# EAGLE board Arduino-Pro-Panel-v16 (EAGLE 7.5.0), part 1 of 2
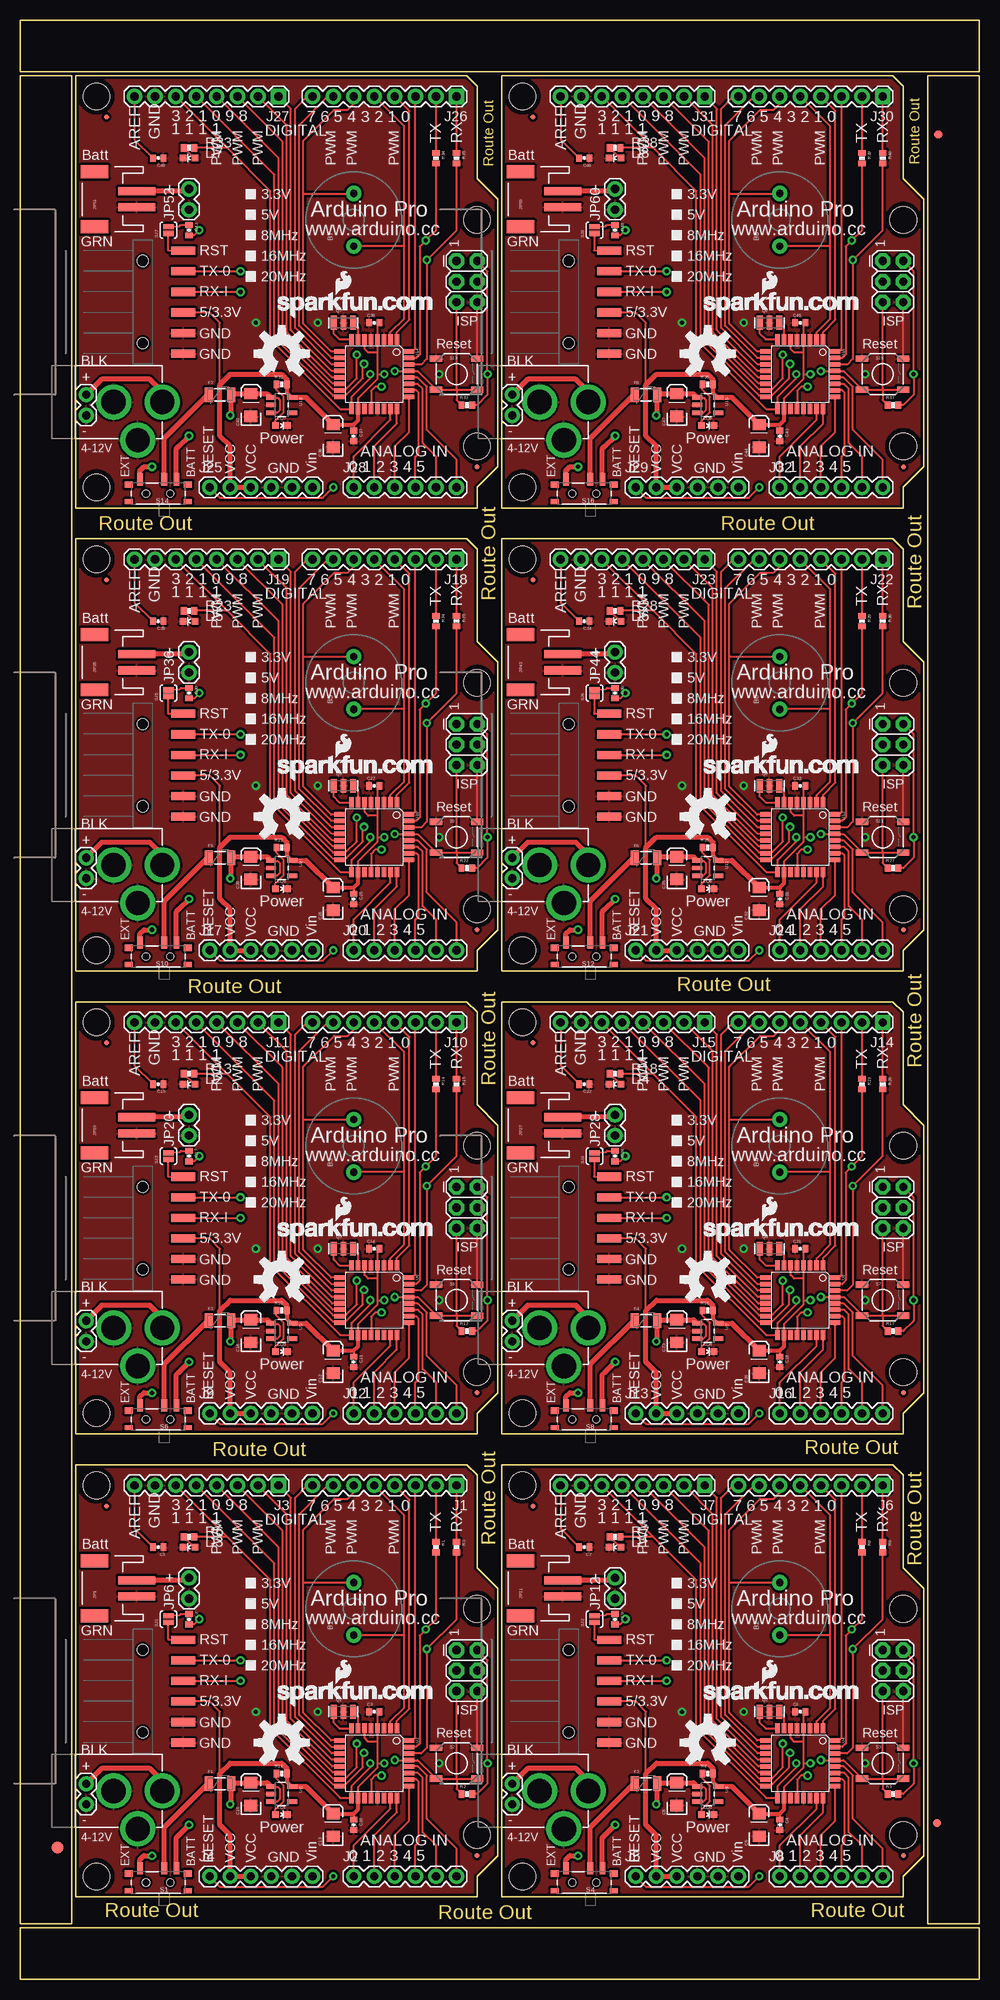
[diagram p0: board, top side]
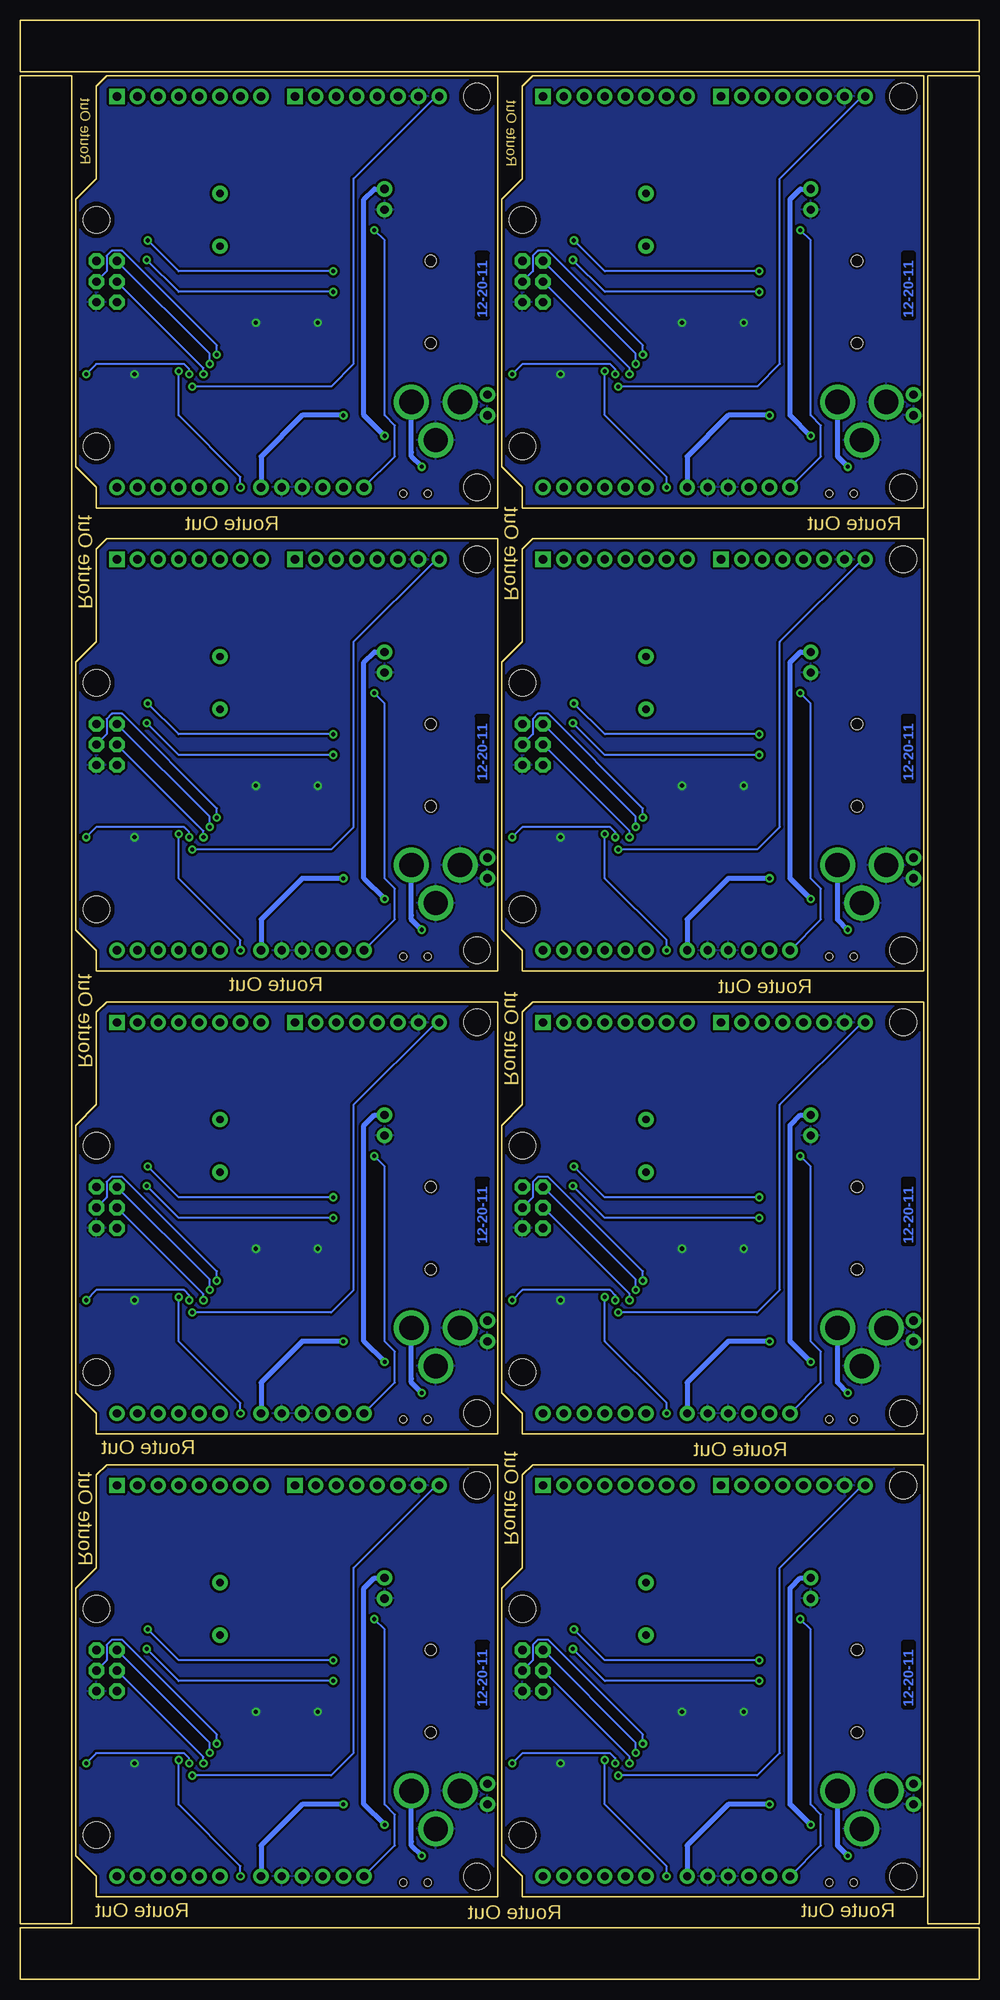
[diagram p1: board, bottom side, seen from below]

Size 118.36 x 241.81 mm. Coordinates in mm from the lower left corner, seen from the top.
Outline: 79.25,0 0,0 0,6.35 29.72,6.35
Outline: 27.18,6.35 118.36,6.35 118.36,0 76.71,0
Outline: 6.35,82.55 6.35,6.86 0,6.86 0,33.02
Outline: 0,30.48 0,234.95 6.35,234.95 6.35,80.01
Outline: 118.36,82.55 118.36,6.86 112.01,6.86 112.01,33.02
Outline: 112.01,30.48 112.01,234.95 118.36,234.95 118.36,80.01
Outline: 39.12,241.81 118.36,241.81 118.36,235.46 88.65,235.46
Outline: 91.19,235.46 0,235.46 0,241.81 41.66,241.81
Outline: 6.86,63.5 6.86,10.16 56.39,10.16 56.39,12.7 58.93,15.24 58.93,48.26 56.39,50.8 56.39,62.23 55.12,63.5 6.86,63.5
Outline: 59.44,63.5 59.44,10.16 108.97,10.16 108.97,12.7 111.51,15.24 111.51,48.26 108.97,50.8 108.97,62.23 107.7,63.5 59.44,63.5
Outline: 6.86,120.65 6.86,67.31 56.39,67.31 56.39,69.85 58.93,72.39 58.93,105.41 56.39,107.95 56.39,119.38 55.12,120.65 6.86,120.65
Outline: 59.44,120.65 59.44,67.31 108.97,67.31 108.97,69.85 111.51,72.39 111.51,105.41 108.97,107.95 108.97,119.38 107.7,120.65 59.44,120.65
Outline: 6.86,177.8 6.86,124.46 56.39,124.46 56.39,127 58.93,129.54 58.93,162.56 56.39,165.1 56.39,176.53 55.12,177.8 6.86,177.8
Outline: 59.44,177.8 59.44,124.46 108.97,124.46 108.97,127 111.51,129.54 111.51,162.56 108.97,165.1 108.97,176.53 107.7,177.8 59.44,177.8
Outline: 6.86,234.95 6.86,181.61 56.39,181.61 56.39,184.15 58.93,186.69 58.93,219.71 56.39,222.25 56.39,233.68 55.12,234.95 6.86,234.95
Outline: 59.44,234.95 59.44,181.61 108.97,181.61 108.97,184.15 111.51,186.69 111.51,219.71 108.97,222.25 108.97,233.68 107.7,234.95 59.44,234.95
Copper layers (1*16): Top 0.035mm / dielectric 1.5mm / Bottom 0.035mm
Design rules "SparkFun": minimum track width 8mil, minimum drill 20mil, track to track 8mil, track to pad 8mil, pad to pad 8mil, via to via 8mil, smd to smd 8mil, copper to edge 10mil, drill to drill 8mil, minimum pad ring 12mil, minimum via ring 10mil, stop-mask expansion 4mil, vias tented up to drill 20mil, thermal gap 10mil
Net classes: 0 default: width 0.203 mm; 1 vcc: width 0.254 mm

## Footprints (pad centres in the part's own frame; a part is rotated, then mirrored left to right if it is on the bottom)
BUZZER-12MM-NS-KIT = drill 0.9 pad 1.88: + 3.25,0; - -3.25,0
0402-CAP = smd 0.7 x 0.9: 1 -0.65,0; 2 0.65,0
EIA3216 = smd 1.4 x 1.6: A 1.4,0; C -1.4,0
LED-0603 = smd 0.8 x 0.8: A 0,-0.75; C 0,0.75
FIDUCIAL-1.5X3 = smd 1.5 x 1.5: 1 0,0
FIDUCIAL-1X2 = smd 1 x 1: 1 0,0
PTC-1206 = smd 1 x 1.8: 1 -1.4,0; 2 1.4,0
1X08 = drill 1.016 pad 1.88 square: 1 0,0 | drill 1.016 pad 1.88: 2 2.54,0; 3 5.08,0; 4 7.62,0; 5 10.16,0; 6 12.7,0; 7 15.24,0; 8 17.78,0
1X06 = drill 1.016 pad 1.88: 1 0,0; 2 2.54,0; 3 5.08,0; 4 7.62,0; 5 10.16,0; 6 12.7,0
JST-2-SMD = smd 1 x 4.6: 1 -1,-3.7; 2 1,-3.7 | smd 1.6 x 3.4: NC1 -3.4,1.5; NC2 3.4,1.5
FIDUCIAL-1X2.5 = smd 0.635 x 0.635: 1 0,0
2X3 = drill 1.016 pad 1.88 octagon: 1 0,0; 2 0,2.54; 3 2.54,0; 4 2.54,2.54; 5 5.08,0; 6 5.08,2.54
POWER_JACK_PTH = drill 2.997 pad 4.318: GND 0,7.7; GNDBREAK 4.7,10.7; PWR 0,13.7
1X02 = drill 1.016 pad 1.88: 1 0,0; 2 2.54,0
1X06-SMD = smd 1 x 3: 1 -6.35,5; 2 -3.81,5; 3 -1.27,5; 4 1.27,5; 5 3.81,5; 6 6.35,5 | hole 1.4: -5.08,0; 5.08,0
RESONATOR-SMD = smd 0.7 x 1.7: 1 -1.2,0; 2 0,0; 3 1.2,0
0402-RES = smd 0.7 x 0.9: 1 -0.65,0; 2 0.65,0
SWITCH-SPST-SMD-A = smd 0.7 x 1.5: 1 -2.25,-1.75; 2 -0.75,-1.75; 3 2.25,-1.75 | smd 1 x 0.6: GND1 -3.65,1; GND3 3.65,1 | smd 1 x 0.8: GND2 -3.65,-1.1; GND4 3.65,-1.1 | hole 0.9: -1.5,0; 1.5,0
TACTILE_SWITCH_SMD = smd 1.524 x 0.762: 1 -2.54,1.905; 2 2.54,1.905; 3 -2.54,-1.905; 4 2.54,-1.905
SJ_2S-NOTRACE = smd 0.635 x 1.27: 1 -0.401,0; 2 0.413,0
TQFP32-08 = smd 1.27 x 0.559: 1 -4.293,2.8; 2 -4.293,2; 3 -4.293,1.2; 4 -4.293,0.4; 5 -4.293,-0.4; 6 -4.293,-1.2; 7 -4.293,-2; 8 -4.293,-2.8; 17 4.293,-2.8; 18 4.293,-2; 19 4.293,-1.2; 20 4.293,-0.4; 21 4.293,0.4; 22 4.293,1.2; 23 4.293,2; 24 4.293,2.8 | smd 0.559 x 1.27: 9 -2.8,-4.293; 10 -2,-4.293; 11 -1.2,-4.293; 12 -0.4,-4.293; 13 0.4,-4.293; 14 1.2,-4.293; 15 2,-4.293; 16 2.8,-4.293; 25 2.8,4.293; 26 2,4.293; 27 1.2,4.293; 28 0.4,4.293; 29 -0.4,4.293; 30 -1.2,4.293; 31 -2,4.293; 32 -2.8,4.293
SOT23-5 = smd 0.55 x 1.2: 1 -0.95,-1.3; 2 0,-1.3; 3 0.95,-1.3; 4 0.95,1.3; 5 -0.95,1.3
STAND-OFF = hole 3.302: 0,0

## Placement (x,y rotation side)
B1  BUZZER  [BUZZER-12MM-NS-KIT]  41.15,45.72 90 top
B2  BUZZER  [BUZZER-12MM-NS-KIT]  93.73,45.72 90 top
B3  BUZZER  [BUZZER-12MM-NS-KIT]  41.15,102.87 90 top
B4  BUZZER  [BUZZER-12MM-NS-KIT]  93.73,102.87 90 top
B5  BUZZER  [BUZZER-12MM-NS-KIT]  41.15,160.02 90 top
B6  BUZZER  [BUZZER-12MM-NS-KIT]  93.73,160.02 90 top
B7  BUZZER  [BUZZER-12MM-NS-KIT]  41.15,217.17 90 top
B8  BUZZER  [BUZZER-12MM-NS-KIT]  93.73,217.17 90 top
C1  0.1uF  [0402-CAP]  17.02,53.34 180 top
C2  0.1uF  [0402-CAP]  20.83,44.45 270 top
C3  0.1uF  [0402-CAP]  43.69,33.02 0 top
C4  0.1uF  [0402-CAP]  93.73,19.05 270 top
C5  10uF  [EIA3216]  91.19,19.05 90 top
C6  0.1uF  [0402-CAP]  96.27,33.02 0 top
C7  0.1uF  [0402-CAP]  69.6,53.34 180 top
C8  10uF  [EIA3216]  81.03,22.86 90 top
C9  0.1uF  [0402-CAP]  73.41,44.45 270 top
C10  0.1uF  [0402-CAP]  41.15,19.05 270 top
C11  0.1uF  [0402-CAP]  41.15,76.2 270 top
C12  10uF  [EIA3216]  38.61,76.2 90 top
C13  10uF  [EIA3216]  38.61,19.05 90 top
C14  0.1uF  [0402-CAP]  43.69,90.17 0 top
C15  0.1uF  [0402-CAP]  17.02,110.49 180 top
C16  10uF  [EIA3216]  28.45,80.01 90 top
C17  0.1uF  [0402-CAP]  20.83,101.6 270 top
C18  0.1uF  [0402-CAP]  93.73,76.2 270 top
C19  10uF  [EIA3216]  28.45,22.86 90 top
C20  10uF  [EIA3216]  91.19,76.2 90 top
C21  0.1uF  [0402-CAP]  96.27,90.17 0 top
C22  0.1uF  [0402-CAP]  69.6,110.49 180 top
C23  10uF  [EIA3216]  81.03,80.01 90 top
C24  0.1uF  [0402-CAP]  73.41,101.6 270 top
C25  0.1uF  [0402-CAP]  41.15,133.35 270 top
C26  10uF  [EIA3216]  38.61,133.35 90 top
C27  0.1uF  [0402-CAP]  43.69,147.32 0 top
C28  0.1uF  [0402-CAP]  17.02,167.64 180 top
C29  10uF  [EIA3216]  28.45,137.16 90 top
C30  0.1uF  [0402-CAP]  20.83,158.75 270 top
C31  0.1uF  [0402-CAP]  93.73,133.35 270 top
C32  10uF  [EIA3216]  91.19,133.35 90 top
C33  0.1uF  [0402-CAP]  96.27,147.32 0 top
C34  0.1uF  [0402-CAP]  69.6,167.64 180 top
C35  10uF  [EIA3216]  81.03,137.16 90 top
C36  0.1uF  [0402-CAP]  73.41,158.75 270 top
C37  0.1uF  [0402-CAP]  41.15,190.5 270 top
C38  10uF  [EIA3216]  38.61,190.5 90 top
C39  0.1uF  [0402-CAP]  43.69,204.47 0 top
C40  0.1uF  [0402-CAP]  17.02,224.79 180 top
C41  10uF  [EIA3216]  28.45,194.31 90 top
C42  0.1uF  [0402-CAP]  20.83,215.9 270 top
C43  0.1uF  [0402-CAP]  93.73,190.5 270 top
C44  10uF  [EIA3216]  91.19,190.5 90 top
C45  0.1uF  [0402-CAP]  96.27,204.47 0 top
C46  0.1uF  [0402-CAP]  69.6,224.79 180 top
C47  10uF  [EIA3216]  81.03,194.31 90 top
C48  0.1uF  [0402-CAP]  73.41,215.9 270 top
D1  Green  [LED-0603]  73.41,53.34 90 top
D2  Green  [LED-0603]  20.83,110.49 90 top
D3  Green  [LED-0603]  20.83,53.34 90 top
D4  Green  [LED-0603]  73.41,110.49 90 top
D5  Green  [LED-0603]  20.83,167.64 90 top
D6  Green  [LED-0603]  73.41,167.64 90 top
D7  Green  [LED-0603]  20.83,224.79 90 top
D8  Green  [LED-0603]  73.41,224.79 90 top
E$1  [FIDUCIAL-1.5X3]  4.57,16.26 0 top
E$5  [FIDUCIAL-1X2]  113.16,19.3 0 top
E$7  [FIDUCIAL-1X2]  113.28,227.71 90 top
F1  500mA-PTC  [PTC-1206]  24.64,24.13 0 top
F2  500mA-PTC  [PTC-1206]  77.22,24.13 0 top
F3  500mA-PTC  [PTC-1206]  24.64,81.28 0 top
F4  500mA-PTC  [PTC-1206]  77.22,81.28 0 top
F5  500mA-PTC  [PTC-1206]  24.64,138.43 0 top
F6  500mA-PTC  [PTC-1206]  77.22,138.43 0 top
F7  500mA-PTC  [PTC-1206]  24.64,195.58 0 top
F8  500mA-PTC  [PTC-1206]  77.22,195.58 0 top
J1  Digital  [1X08]  53.85,60.96 180 top
J2  Analog  [1X06]  41.15,12.7 0 top
J3  [1X08]  31.88,60.96 180 top
J4  POWER  [1X06]  23.37,12.7 0 top
J5  POWER  [1X06]  75.95,12.7 0 top
J6  Digital  [1X08]  106.43,60.96 180 top
J7  [1X08]  84.45,60.96 180 top
J8  Analog  [1X06]  93.73,12.7 0 top
J9  POWER  [1X06]  23.37,69.85 0 top
J10  Digital  [1X08]  53.85,118.11 180 top
J11  [1X08]  31.88,118.11 180 top
J12  Analog  [1X06]  41.15,69.85 0 top
J13  POWER  [1X06]  75.95,69.85 0 top
J14  Digital  [1X08]  106.43,118.11 180 top
J15  [1X08]  84.45,118.11 180 top
J16  Analog  [1X06]  93.73,69.85 0 top
J17  POWER  [1X06]  23.37,127 0 top
J18  Digital  [1X08]  53.85,175.26 180 top
J19  [1X08]  31.88,175.26 180 top
J20  Analog  [1X06]  41.15,127 0 top
J21  POWER  [1X06]  75.95,127 0 top
J22  Digital  [1X08]  106.43,175.26 180 top
J23  [1X08]  84.45,175.26 180 top
J24  Analog  [1X06]  93.73,127 0 top
J25  POWER  [1X06]  23.37,184.15 0 top
J26  Digital  [1X08]  53.85,232.41 180 top
J27  [1X08]  31.88,232.41 180 top
J28  Analog  [1X06]  41.15,184.15 0 top
J29  POWER  [1X06]  75.95,184.15 0 top
J30  Digital  [1X08]  106.43,232.41 180 top
J31  [1X08]  84.45,232.41 180 top
J32  Analog  [1X06]  93.73,184.15 0 top
JP1  LiPo  [JST-2-SMD]  10.67,48.26 90 top
JP2  FIDUCIAL1X2.5  [FIDUCIAL-1X2.5]  56.39,15.24 0 top
JP3  ISP  [2X3]  53.85,40.64 270 top
JP4  POWER_JACKPTH  [POWER_JACK_PTH]  3.81,23.24 270 top
JP5  FIDUCIAL1X2.5  [FIDUCIAL-1X2.5]  10.67,58.42 0 top
JP6  External  [1X02]  20.83,46.99 90 top
JP7  External  [1X02]  8.13,21.59 90 top
JP8  POWER_JACKPTH  [POWER_JACK_PTH]  56.39,23.24 270 top
JP9  Program  [1X06-SMD]  15.11,35.56 270 top
JP10  ISP  [2X3]  106.43,40.64 270 top
JP11  LiPo  [JST-2-SMD]  63.25,48.26 90 top
JP12  External  [1X02]  73.41,46.99 90 top
JP13  External  [1X02]  60.71,21.59 90 top
JP14  Program  [1X06-SMD]  67.69,35.56 270 top
JP15  FIDUCIAL1X2.5  [FIDUCIAL-1X2.5]  108.97,15.24 0 top
JP16  FIDUCIAL1X2.5  [FIDUCIAL-1X2.5]  63.25,58.42 0 top
JP17  POWER_JACKPTH  [POWER_JACK_PTH]  3.81,80.39 270 top
JP18  ISP  [2X3]  53.85,97.79 270 top
JP19  LiPo  [JST-2-SMD]  10.67,105.41 90 top
JP20  External  [1X02]  20.83,104.14 90 top
JP21  External  [1X02]  8.13,78.74 90 top
JP22  Program  [1X06-SMD]  15.11,92.71 270 top
JP23  FIDUCIAL1X2.5  [FIDUCIAL-1X2.5]  56.39,72.39 0 top
JP24  FIDUCIAL1X2.5  [FIDUCIAL-1X2.5]  10.67,115.57 0 top
JP25  POWER_JACKPTH  [POWER_JACK_PTH]  56.39,80.39 270 top
JP26  ISP  [2X3]  106.43,97.79 270 top
JP27  LiPo  [JST-2-SMD]  63.25,105.41 90 top
JP28  External  [1X02]  73.41,104.14 90 top
JP29  External  [1X02]  60.71,78.74 90 top
JP30  Program  [1X06-SMD]  67.69,92.71 270 top
JP31  FIDUCIAL1X2.5  [FIDUCIAL-1X2.5]  108.97,72.39 0 top
JP32  FIDUCIAL1X2.5  [FIDUCIAL-1X2.5]  63.25,115.57 0 top
JP33  POWER_JACKPTH  [POWER_JACK_PTH]  3.81,137.54 270 top
JP34  ISP  [2X3]  53.85,154.94 270 top
JP35  LiPo  [JST-2-SMD]  10.67,162.56 90 top
JP36  External  [1X02]  20.83,161.29 90 top
JP37  External  [1X02]  8.13,135.89 90 top
JP38  Program  [1X06-SMD]  15.11,149.86 270 top
JP39  FIDUCIAL1X2.5  [FIDUCIAL-1X2.5]  56.39,129.54 0 top
JP40  FIDUCIAL1X2.5  [FIDUCIAL-1X2.5]  10.67,172.72 0 top
JP41  POWER_JACKPTH  [POWER_JACK_PTH]  56.39,137.54 270 top
JP42  ISP  [2X3]  106.43,154.94 270 top
JP43  LiPo  [JST-2-SMD]  63.25,162.56 90 top
JP44  External  [1X02]  73.41,161.29 90 top
JP45  External  [1X02]  60.71,135.89 90 top
JP46  Program  [1X06-SMD]  67.69,149.86 270 top
JP47  FIDUCIAL1X2.5  [FIDUCIAL-1X2.5]  108.97,129.54 0 top
JP48  FIDUCIAL1X2.5  [FIDUCIAL-1X2.5]  63.25,172.72 0 top
JP49  POWER_JACKPTH  [POWER_JACK_PTH]  3.81,194.69 270 top
JP50  ISP  [2X3]  53.85,212.09 270 top
JP51  LiPo  [JST-2-SMD]  10.67,219.71 90 top
JP52  External  [1X02]  20.83,218.44 90 top
JP53  External  [1X02]  8.13,193.04 90 top
JP54  Program  [1X06-SMD]  15.11,207.01 270 top
JP55  FIDUCIAL1X2.5  [FIDUCIAL-1X2.5]  56.39,186.69 0 top
JP56  FIDUCIAL1X2.5  [FIDUCIAL-1X2.5]  10.67,229.87 0 top
JP57  POWER_JACKPTH  [POWER_JACK_PTH]  56.39,194.69 270 top
JP58  ISP  [2X3]  106.43,212.09 270 top
JP59  LiPo  [JST-2-SMD]  63.25,219.71 90 top
JP60  External  [1X02]  73.41,218.44 90 top
JP61  External  [1X02]  60.71,193.04 90 top
JP62  Program  [1X06-SMD]  67.69,207.01 270 top
JP63  FIDUCIAL1X2.5  [FIDUCIAL-1X2.5]  108.97,186.69 0 top
JP64  FIDUCIAL1X2.5  [FIDUCIAL-1X2.5]  63.25,229.87 0 top
LED1  Red  [LED-0603]  32.26,20.32 270 top
LED2  Red  [LED-0603]  84.84,20.32 270 top
LED3  Red  [LED-0603]  32.26,77.47 270 top
LED4  Red  [LED-0603]  84.84,77.47 270 top
LED5  Red  [LED-0603]  32.26,134.62 270 top
LED6  Red  [LED-0603]  84.84,134.62 270 top
LED7  Red  [LED-0603]  32.26,191.77 270 top
LED8  Red  [LED-0603]  84.84,191.77 270 top
Q1  RESONATORSMD  [RESONATOR-SMD]  39.88,33.02 0 top
Q2  RESONATORSMD  [RESONATOR-SMD]  92.46,33.02 0 top
Q3  RESONATORSMD  [RESONATOR-SMD]  39.88,90.17 0 top
Q4  RESONATORSMD  [RESONATOR-SMD]  92.46,90.17 0 top
Q5  RESONATORSMD  [RESONATOR-SMD]  39.88,147.32 0 top
Q6  RESONATORSMD  [RESONATOR-SMD]  92.46,147.32 0 top
Q7  RESONATORSMD  [RESONATOR-SMD]  39.88,204.47 0 top
Q8  RESONATORSMD  [RESONATOR-SMD]  92.46,204.47 0 top
R1  1K  [0402-RES]  51.31,53.34 270 top
R2  10K  [0402-RES]  55.12,22.86 0 top
R3  1K  [0402-RES]  53.85,53.34 270 top
R4  4.7K  [0402-RES]  84.84,25.4 0 top
R5  10K  [0402-RES]  107.7,22.86 0 top
R6  1K  [0402-RES]  20.83,54.61 180 top
R7  1K  [0402-RES]  73.41,54.61 180 top
R8  1K  [0402-RES]  103.89,53.34 270 top
R9  1K  [0402-RES]  106.43,53.34 270 top
R10  4.7K  [0402-RES]  32.26,82.55 0 top
R11  4.7K  [0402-RES]  32.26,25.4 0 top
R12  10K  [0402-RES]  55.12,80.01 0 top
R13  1K  [0402-RES]  20.83,111.76 180 top
R14  1K  [0402-RES]  51.31,110.49 270 top
R15  1K  [0402-RES]  53.85,110.49 270 top
R16  4.7K  [0402-RES]  84.84,82.55 0 top
R17  10K  [0402-RES]  107.7,80.01 0 top
R18  1K  [0402-RES]  73.41,111.76 180 top
R19  1K  [0402-RES]  103.89,110.49 270 top
R20  1K  [0402-RES]  106.43,110.49 270 top
R21  4.7K  [0402-RES]  32.26,139.7 0 top
R22  10K  [0402-RES]  55.12,137.16 0 top
R23  1K  [0402-RES]  20.83,168.91 180 top
R24  1K  [0402-RES]  51.31,167.64 270 top
R25  1K  [0402-RES]  53.85,167.64 270 top
R26  4.7K  [0402-RES]  84.84,139.7 0 top
R27  10K  [0402-RES]  107.7,137.16 0 top
R28  1K  [0402-RES]  73.41,168.91 180 top
R29  1K  [0402-RES]  103.89,167.64 270 top
R30  1K  [0402-RES]  106.43,167.64 270 top
R31  4.7K  [0402-RES]  32.26,196.85 0 top
R32  10K  [0402-RES]  55.12,194.31 0 top
R33  1K  [0402-RES]  20.83,226.06 180 top
R34  1K  [0402-RES]  51.31,224.79 270 top
R35  1K  [0402-RES]  53.85,224.79 270 top
R36  4.7K  [0402-RES]  84.84,196.85 0 top
R37  10K  [0402-RES]  107.7,194.31 0 top
R38  1K  [0402-RES]  73.41,226.06 180 top
R39  1K  [0402-RES]  103.89,224.79 270 top
R40  1K  [0402-RES]  106.43,224.79 270 top
S1  Select  [SWITCH-SPST-SMD-A]  17.02,11.94 180 top
S2  Reset  [TACTILE_SWITCH_SMD]  53.85,26.67 0 top
S3  Reset  [TACTILE_SWITCH_SMD]  106.43,26.67 0 top
S4  Select  [SWITCH-SPST-SMD-A]  69.6,11.94 180 top
S5  Reset  [TACTILE_SWITCH_SMD]  53.85,83.82 0 top
S6  Select  [SWITCH-SPST-SMD-A]  17.02,69.09 180 top
S7  Reset  [TACTILE_SWITCH_SMD]  106.43,83.82 0 top
S8  Select  [SWITCH-SPST-SMD-A]  69.6,69.09 180 top
S9  Reset  [TACTILE_SWITCH_SMD]  53.85,140.97 0 top
S10  Select  [SWITCH-SPST-SMD-A]  17.02,126.24 180 top
S11  Reset  [TACTILE_SWITCH_SMD]  106.43,140.97 0 top
S12  Select  [SWITCH-SPST-SMD-A]  69.6,126.24 180 top
S13  Reset  [TACTILE_SWITCH_SMD]  53.85,198.12 0 top
S14  Select  [SWITCH-SPST-SMD-A]  17.02,183.39 180 top
S15  Reset  [TACTILE_SWITCH_SMD]  106.43,198.12 0 top
S16  Select  [SWITCH-SPST-SMD-A]  69.6,183.39 180 top
SJ1  SOLDERJUMPERNC3  [SJ_2S-NOTRACE]  18.29,44.45 90 top
SJ2  SOLDERJUMPERNC3  [SJ_2S-NOTRACE]  70.87,44.45 90 top
SJ3  SOLDERJUMPERNC3  [SJ_2S-NOTRACE]  18.29,101.6 90 top
SJ4  SOLDERJUMPERNC3  [SJ_2S-NOTRACE]  70.87,101.6 90 top
SJ5  SOLDERJUMPERNC3  [SJ_2S-NOTRACE]  18.29,158.75 90 top
SJ6  SOLDERJUMPERNC3  [SJ_2S-NOTRACE]  70.87,158.75 90 top
SJ7  SOLDERJUMPERNC3  [SJ_2S-NOTRACE]  18.29,215.9 90 top
SJ8  SOLDERJUMPERNC3  [SJ_2S-NOTRACE]  70.87,215.9 90 top
U1  ATMEGA328  [TQFP32-08]  43.69,26.67 270 top
U2  3.3V  [SOT23-5]  32.26,22.86 270 top
U3  3.3V  [SOT23-5]  84.84,22.86 270 top
U4  ATMEGA328  [TQFP32-08]  96.27,26.67 270 top
U5  3.3V  [SOT23-5]  32.26,80.01 270 top
U6  ATMEGA328  [TQFP32-08]  43.69,83.82 270 top
U7  3.3V  [SOT23-5]  84.84,80.01 270 top
U8  ATMEGA328  [TQFP32-08]  96.27,83.82 270 top
U9  3.3V  [SOT23-5]  32.26,137.16 270 top
U10  ATMEGA328  [TQFP32-08]  43.69,140.97 270 top
U11  3.3V  [SOT23-5]  84.84,137.16 270 top
U12  ATMEGA328  [TQFP32-08]  96.27,140.97 270 top
U13  3.3V  [SOT23-5]  32.26,194.31 270 top
U14  ATMEGA328  [TQFP32-08]  43.69,198.12 270 top
U15  3.3V  [SOT23-5]  84.84,194.31 270 top
U16  ATMEGA328  [TQFP32-08]  96.27,198.12 270 top
U$1  STAND-OFF  [STAND-OFF]  9.4,60.96 0 top
U$2  OSHW-LOGOL  [OSHW-LOGO-L]  32.26,29.21 0 top
U$3  STAND-OFF  [STAND-OFF]  9.4,12.7 0 top
U$4  STAND-OFF  [STAND-OFF]  108.97,45.72 0 top
U$5  STAND-OFF  [STAND-OFF]  108.97,17.78 0 top
U$6  LOGO-SFENEW  [SFE-NEW-WEBLOGO]  84.33,33.66 0 top
U$7  STAND-OFF  [STAND-OFF]  61.98,12.7 0 top
U$8  STAND-OFF  [STAND-OFF]  61.98,60.96 0 top
U$9  STAND-OFF  [STAND-OFF]  56.39,45.72 0 top
U$10  STAND-OFF  [STAND-OFF]  56.39,17.78 0 top
U$11  LOGO-SFENEW  [SFE-NEW-WEBLOGO]  31.75,33.66 0 top
U$12  OSHW-LOGOL  [OSHW-LOGO-L]  84.84,29.21 0 top
U$13  STAND-OFF  [STAND-OFF]  56.39,102.87 0 top
U$14  STAND-OFF  [STAND-OFF]  56.39,74.93 0 top
U$15  LOGO-SFENEW  [SFE-NEW-WEBLOGO]  31.75,90.81 0 top
U$16  STAND-OFF  [STAND-OFF]  9.4,69.85 0 top
U$17  STAND-OFF  [STAND-OFF]  9.4,118.11 0 top
U$18  OSHW-LOGOL  [OSHW-LOGO-L]  32.26,86.36 0 top
U$19  STAND-OFF  [STAND-OFF]  108.97,102.87 0 top
U$20  STAND-OFF  [STAND-OFF]  108.97,74.93 0 top
U$21  LOGO-SFENEW  [SFE-NEW-WEBLOGO]  84.33,90.81 0 top
U$22  STAND-OFF  [STAND-OFF]  61.98,69.85 0 top
U$23  STAND-OFF  [STAND-OFF]  61.98,118.11 0 top
U$24  OSHW-LOGOL  [OSHW-LOGO-L]  84.84,86.36 0 top
U$25  STAND-OFF  [STAND-OFF]  56.39,160.02 0 top
U$26  STAND-OFF  [STAND-OFF]  56.39,132.08 0 top
U$27  LOGO-SFENEW  [SFE-NEW-WEBLOGO]  31.75,147.96 0 top
U$28  STAND-OFF  [STAND-OFF]  9.4,127 0 top
U$29  STAND-OFF  [STAND-OFF]  9.4,175.26 0 top
U$30  OSHW-LOGOL  [OSHW-LOGO-L]  32.26,143.51 0 top
U$31  STAND-OFF  [STAND-OFF]  108.97,160.02 0 top
U$32  STAND-OFF  [STAND-OFF]  108.97,132.08 0 top
U$33  LOGO-SFENEW  [SFE-NEW-WEBLOGO]  84.33,147.96 0 top
U$34  STAND-OFF  [STAND-OFF]  61.98,127 0 top
U$35  STAND-OFF  [STAND-OFF]  61.98,175.26 0 top
U$36  OSHW-LOGOL  [OSHW-LOGO-L]  84.84,143.51 0 top
U$37  STAND-OFF  [STAND-OFF]  56.39,217.17 0 top
U$38  STAND-OFF  [STAND-OFF]  56.39,189.23 0 top
U$39  LOGO-SFENEW  [SFE-NEW-WEBLOGO]  31.75,205.1 0 top
U$40  STAND-OFF  [STAND-OFF]  9.4,184.15 0 top
U$41  STAND-OFF  [STAND-OFF]  9.4,232.41 0 top
U$42  OSHW-LOGOL  [OSHW-LOGO-L]  32.26,200.66 0 top
U$43  STAND-OFF  [STAND-OFF]  108.97,217.17 0 top
U$44  STAND-OFF  [STAND-OFF]  108.97,189.23 0 top
U$45  LOGO-SFENEW  [SFE-NEW-WEBLOGO]  84.33,205.1 0 top
U$46  STAND-OFF  [STAND-OFF]  61.98,184.15 0 top
U$47  STAND-OFF  [STAND-OFF]  61.98,232.41 0 top
U$48  OSHW-LOGOL  [OSHW-LOGO-L]  84.84,200.66 0 top

## Library data of the parts
B1-B8 C1-C48 D1-D8 F1-F8 J1-J32 JP1 JP3 JP4 JP6-JP14 JP17-JP22 JP25-JP30 JP33-JP38 JP41-JP46 JP49-JP54 JP57-JP62 LED1-LED8 Q1-Q8 R1-R40 S1-S16 SJ1-SJ8 U1-U16 U$1-U$48 = SparkFun
E$1 = SparkFun-Retired
E$5 E$7 = SparkFun-Aesthetics
JP2 JP5 JP15 JP16 JP23 JP24 JP31 JP32 JP39 JP40 JP47 JP48 JP55 JP56 JP63 JP64 = abes

## Nets
A0: J2.1 U1.23
A1: J2.2 U1.24
A2: J2.3 U1.25
A3: J2.4 U1.26
A4: J2.5 U1.27
A5: J2.6 U1.28
A6: J8.6 U4.28
A7: J8.5 U4.27
A8: J8.4 U4.26
A9: J8.3 U4.25
A10: J8.2 U4.24
A11: J8.1 U4.23
A12: J12.6 U6.28
A13: J12.5 U6.27
A14: J12.4 U6.26
A15: J12.3 U6.25
A16: J12.2 U6.24
A17: J12.1 U6.23
A18: J16.6 U8.28
A19: J16.5 U8.27
A20: J16.4 U8.26
A21: J16.3 U8.25
A22: J16.2 U8.24
A23: J16.1 U8.23
A24: J20.6 U10.28
A25: J20.5 U10.27
A26: J20.4 U10.26
A27: J20.3 U10.25
A28: J20.2 U10.24
A29: J20.1 U10.23
A30: J24.6 U12.28
A31: J24.5 U12.27
A32: J24.4 U12.26
A33: J24.3 U12.25
A34: J24.2 U12.24
A35: J24.1 U12.23
A36: J28.6 U14.28
A37: J28.5 U14.27
A38: J28.4 U14.26
A39: J28.3 U14.25
A40: J28.2 U14.24
A41: J28.1 U14.23
A42: J32.6 U16.28
A43: J32.5 U16.27
A44: J32.4 U16.26
A45: J32.3 U16.25
A46: J32.2 U16.24
A47: J32.1 U16.23
AREF: C1.2 J3.8 U1.20
AREF1: C7.2 J7.8 U4.20
AREF2: C15.2 J11.8 U6.20
AREF3: C22.2 J15.8 U8.20
AREF4: C28.2 J19.8 U10.20
AREF5: C34.2 J23.8 U12.20
AREF6: C40.2 J27.8 U14.20
AREF7: C46.2 J31.8 U16.20
D1: J7.3 U4.14
D2: J1.3 U1.32
D3: J1.4 U1.1
D4: B1.- J1.5 U1.2
D5: B1.+ J1.6 U1.9
D6: J1.7 U1.10
D7: J1.8 U1.11
D8: J3.1 U1.12
D9: J3.2 U1.13
D10: J3.3 U1.14
D11: J7.2 U4.13
D12: J7.1 U4.12
D13: J6.8 U4.11
D14: J6.7 U4.10
D15: B2.+ J6.6 U4.9
D16: B2.- J6.5 U4.2
D17: J6.4 U4.1
D18: J6.3 U4.32
D19: J11.3 U6.14
D20: J11.2 U6.13
D21: J11.1 U6.12
D22: J10.8 U6.11
D23: J10.7 U6.10
D24: B3.+ J10.6 U6.9
D25: B3.- J10.5 U6.2
D26: J10.4 U6.1
D27: J10.3 U6.32
D28: J15.3 U8.14
D29: J15.2 U8.13
D30: J15.1 U8.12
D31: J14.8 U8.11
D32: J14.7 U8.10
D33: B4.+ J14.6 U8.9
D34: B4.- J14.5 U8.2
D35: J14.4 U8.1
D36: J14.3 U8.32
D37: J19.3 U10.14
D38: J19.2 U10.13
D39: J19.1 U10.12
D40: J18.8 U10.11
D41: J18.7 U10.10
D42: B5.+ J18.6 U10.9
D43: B5.- J18.5 U10.2
D44: J18.4 U10.1
D45: J18.3 U10.32
D46: J23.3 U12.14
D47: J23.2 U12.13
D48: J23.1 U12.12
D49: J22.8 U12.11
D50: J22.7 U12.10
D51: B6.+ J22.6 U12.9
D52: B6.- J22.5 U12.2
D53: J22.4 U12.1
D54: J22.3 U12.32
D55: J27.3 U14.14
D56: J27.2 U14.13
D57: J27.1 U14.12
D58: J26.8 U14.11
D59: J26.7 U14.10
D60: B7.+ J26.6 U14.9
D61: B7.- J26.5 U14.2
D62: J26.4 U14.1
D63: J26.3 U14.32
D64: J31.3 U16.14
D65: J31.2 U16.13
D66: J31.1 U16.12
D67: J30.8 U16.11
D68: J30.7 U16.10
D69: B8.+ J30.6 U16.9
D70: B8.- J30.5 U16.2
D71: J30.4 U16.1
D72: J30.3 U16.32
DTR: JP9.1 SJ1.1
DTR1: JP14.1 SJ2.1
DTR2: JP22.1 SJ3.1
DTR3: JP30.1 SJ4.1
DTR4: JP38.1 SJ5.1
DTR5: JP46.1 SJ6.1
DTR6: JP54.1 SJ7.1
DTR7: JP62.1 SJ8.1
GND [vcc]: C1.1 C3.1 C10.2 C13.C C19.C D3.C J3.7 J4.4 J4.5 JP1.1 JP3.6 JP4.GND JP4.GNDBREAK JP6.1 JP7.1 JP9.5 JP9.6 LED1.C Q1.2 S2.1 S2.2 U1.3 U1.5 U1.21 U2.2
GND1 [vcc]: C4.2 C5.C C6.1 C7.1 C8.C D1.C J5.4 J5.5 J7.7 JP8.GND JP8.GNDBREAK JP10.6 JP11.1 JP12.1 JP13.1 JP14.5 JP14.6 LED2.C Q2.2 S3.1 S3.2 U3.2 U4.3 U4.5 U4.21
GND2 [vcc]: C11.2 C12.C C14.1 C15.1 C16.C D2.C J9.4 J9.5 J11.7 JP17.GND JP17.GNDBREAK JP18.6 JP19.1 JP20.1 JP21.1 JP22.5 JP22.6 LED3.C Q3.2 S5.1 S5.2 U5.2 U6.3 U6.5 U6.21
GND3 [vcc]: C18.2 C20.C C21.1 C22.1 C23.C D4.C J13.4 J13.5 J15.7 JP25.GND JP25.GNDBREAK JP26.6 JP27.1 JP28.1 JP29.1 JP30.5 JP30.6 LED4.C Q4.2 S7.1 S7.2 U7.2 U8.3 U8.5 U8.21
GND4 [vcc]: C25.2 C26.C C27.1 C28.1 C29.C D5.C J17.4 J17.5 J19.7 JP33.GND JP33.GNDBREAK JP34.6 JP35.1 JP36.1 JP37.1 JP38.5 JP38.6 LED5.C Q5.2 S9.1 S9.2 U9.2 U10.3 U10.5 U10.21
GND5 [vcc]: C31.2 C32.C C33.1 C34.1 C35.C D6.C J21.4 J21.5 J23.7 JP41.GND JP41.GNDBREAK JP42.6 JP43.1 JP44.1 JP45.1 JP46.5 JP46.6 LED6.C Q6.2 S11.1 S11.2 U11.2 U12.3 U12.5 U12.21
GND6 [vcc]: C37.2 C38.C C39.1 C40.1 C41.C D7.C J25.4 J25.5 J27.7 JP49.GND JP49.GNDBREAK JP50.6 JP51.1 JP52.1 JP53.1 JP54.5 JP54.6 LED7.C Q7.2 S13.1 S13.2 U13.2 U14.3 U14.5 U14.21
GND7 [vcc]: C43.2 C44.C C45.1 C46.1 C47.C D8.C J29.4 J29.5 J31.7 JP57.GND JP57.GNDBREAK JP58.6 JP59.1 JP60.1 JP61.1 JP62.5 JP62.6 LED8.C Q8.2 S15.1 S15.2 U15.2 U16.3 U16.5 U16.21
LIPO: JP1.2 JP6.2 S1.1
LIPO1: JP11.2 JP12.2 S4.1
LIPO2: JP19.2 JP20.2 S6.1
LIPO3: JP27.2 JP28.2 S8.1
LIPO4: JP35.2 JP36.2 S10.1
LIPO5: JP43.2 JP44.2 S12.1
LIPO6: JP51.2 JP52.2 S14.1
LIPO7: JP59.2 JP60.2 S16.1
MISO: J3.5 JP3.1 U1.16
MISO1: J7.5 JP10.1 U4.16
MISO2: J11.5 JP18.1 U6.16
MISO3: J15.5 JP26.1 U8.16
MISO4: J19.5 JP34.1 U10.16
MISO5: J23.5 JP42.1 U12.16
MISO6: J27.5 JP50.1 U14.16
MISO7: J31.5 JP58.1 U16.16
MOSI: J3.4 JP3.4 U1.15
MOSI1: J7.4 JP10.4 U4.15
MOSI2: J11.4 JP18.4 U6.15
MOSI3: J15.4 JP26.4 U8.15
MOSI4: J19.4 JP34.4 U10.15
MOSI5: J23.4 JP42.4 U12.15
MOSI6: J27.4 JP50.4 U14.15
MOSI7: J31.4 JP58.4 U16.15
N$1: C2.1 SJ1.2
N$2: LED2.A R4.1
N$3: Q1.1 U1.8
N$4: Q1.3 U1.7
N$5: D1.A R7.2
N$6: F2.1 S4.2
N$7: D3.A R6.2
N$8: Q2.1 U4.8
N$9: Q2.3 U4.7
N$10: C9.1 SJ2.2
N$11: LED3.A R10.1
N$12: D2.A R13.2
N$13: F3.1 S6.2
N$14: Q3.1 U6.8
N$15: Q3.3 U6.7
N$16: C17.1 SJ3.2
N$17: LED4.A R16.1
N$18: D4.A R18.2
N$19: F4.1 S8.2
N$20: Q4.1 U8.8
N$21: Q4.3 U8.7
N$22: C24.1 SJ4.2
N$23: LED5.A R21.1
N$24: D5.A R23.2
N$25: F1.1 S1.2
N$26: F5.1 S10.2
N$27: Q5.1 U10.8
N$28: Q5.3 U10.7
N$29: C30.1 SJ5.2
N$30: LED6.A R26.1
N$31: D6.A R28.2
N$32: F6.1 S12.2
N$33: Q6.1 U12.8
N$34: Q6.3 U12.7
N$35: C36.1 SJ6.2
N$36: LED7.A R31.1
N$37: D7.A R33.2
N$38: LED1.A R11.1
N$39: F7.1 S14.2
N$40: Q7.1 U14.8
N$41: Q7.3 U14.7
N$42: C42.1 SJ7.2
N$43: LED8.A R36.1
N$44: D8.A R38.2
N$45: F8.1 S16.2
N$46: Q8.1 U16.8
N$47: Q8.3 U16.7
N$48: C48.1 SJ8.2
RAW [vcc]: JP4.PWR JP7.2 S1.3
RAW1 [vcc]: JP8.PWR JP13.2 S4.3
RAW2 [vcc]: JP17.PWR JP21.2 S6.3
RAW3 [vcc]: JP25.PWR JP29.2 S8.3
RAW4 [vcc]: JP33.PWR JP37.2 S10.3
RAW5 [vcc]: JP41.PWR JP45.2 S12.3
RAW6 [vcc]: JP49.PWR JP53.2 S14.3
RAW7 [vcc]: JP57.PWR JP61.2 S16.3
RESET: C2.2 J4.1 JP3.5 R2.1 S2.3 S2.4 U1.29
RESET1: C9.2 J5.1 JP10.5 R5.1 S3.3 S3.4 U4.29
RESET2: C17.2 J9.1 JP18.5 R12.1 S5.3 S5.4 U6.29
RESET3: C24.2 J13.1 JP26.5 R17.1 S7.3 S7.4 U8.29
RESET4: C30.2 J17.1 JP34.5 R22.1 S9.3 S9.4 U10.29
RESET5: C36.2 J21.1 JP42.5 R27.1 S11.3 S11.4 U12.29
RESET6: C42.2 J25.1 JP50.5 R32.1 S13.3 S13.4 U14.29
RESET7: C48.2 J29.1 JP58.5 R37.1 S15.3 S15.4 U16.29
RX-I: JP9.3 R3.2 U1.30
RX-I1: JP14.3 R9.2 U4.30
RX-I2: JP22.3 R15.2 U6.30
RX-I3: JP30.3 R20.2 U8.30
RX-I4: JP38.3 R25.2 U10.30
RX-I5: JP46.3 R30.2 U12.30
RX-I6: JP54.3 R35.2 U14.30
RX-I7: JP62.3 R40.2 U16.30
RX-IP: J1.2 R1.1
RX-IP1: J6.2 R8.1
RX-IP2: J10.2 R14.1
RX-IP3: J14.2 R19.1
RX-IP4: J18.2 R24.1
RX-IP5: J22.2 R29.1
RX-IP6: J26.2 R34.1
RX-IP7: J30.2 R39.1
SCK: J3.6 JP3.3 R6.1 U1.17
SCK1: J7.6 JP10.3 R7.1 U4.17
SCK2: J11.6 JP18.3 R13.1 U6.17
SCK3: J15.6 JP26.3 R18.1 U8.17
SCK4: J19.6 JP34.3 R23.1 U10.17
SCK5: J23.6 JP42.3 R28.1 U12.17
SCK6: J27.6 JP50.3 R33.1 U14.17
SCK7: J31.6 JP58.3 R38.1 U16.17
TX-O: JP9.2 R1.2 U1.31
TX-O1: JP14.2 R8.2 U4.31
TX-O2: JP22.2 R14.2 U6.31
TX-O3: JP30.2 R19.2 U8.31
TX-O4: JP38.2 R24.2 U10.31
TX-O5: JP46.2 R29.2 U12.31
TX-O6: JP54.2 R34.2 U14.31
TX-O7: JP62.2 R39.2 U16.31
TX-OP: J1.1 R3.1
TX-OP1: J6.1 R9.1
TX-OP2: J10.1 R15.1
TX-OP3: J14.1 R20.1
TX-OP4: J18.1 R25.1
TX-OP5: J22.1 R30.1
TX-OP6: J26.1 R35.1
TX-OP7: J30.1 R40.1
VCC: C3.2 C10.1 C13.A J4.2 J4.3 JP3.2 JP9.4 R2.2 R11.2 U1.4 U1.6 U1.18 U2.5
VCC1: C4.1 C5.A C6.2 J5.2 J5.3 JP10.2 JP14.4 R4.2 R5.2 U3.5 U4.4 U4.6 U4.18
VCC2: C11.1 C12.A C14.2 J9.2 J9.3 JP18.2 JP22.4 R10.2 R12.2 U5.5 U6.4 U6.6 U6.18
VCC3: C18.1 C20.A C21.2 J13.2 J13.3 JP26.2 JP30.4 R16.2 R17.2 U7.5 U8.4 U8.6 U8.18
VCC4: C25.1 C26.A C27.2 J17.2 J17.3 JP34.2 JP38.4 R21.2 R22.2 U9.5 U10.4 U10.6 U10.18
VCC5: C31.1 C32.A C33.2 J21.2 J21.3 JP42.2 JP46.4 R26.2 R27.2 U11.5 U12.4 U12.6 U12.18
VCC6: C37.1 C38.A C39.2 J25.2 J25.3 JP50.2 JP54.4 R31.2 R32.2 U13.5 U14.4 U14.6 U14.18
VCC7: C43.1 C44.A C45.2 J29.2 J29.3 JP58.2 JP62.4 R36.2 R37.2 U15.5 U16.4 U16.6 U16.18
VIN [vcc]: C19.A F1.2 J4.6 U2.1 U2.3
VIN1 [vcc]: C8.A F2.2 J5.6 U3.1 U3.3
VIN2 [vcc]: C16.A F3.2 J9.6 U5.1 U5.3
VIN3 [vcc]: C23.A F4.2 J13.6 U7.1 U7.3
VIN4 [vcc]: C29.A F5.2 J17.6 U9.1 U9.3
VIN5 [vcc]: C35.A F6.2 J21.6 U11.1 U11.3
VIN6 [vcc]: C41.A F7.2 J25.6 U13.1 U13.3
VIN7 [vcc]: C47.A F8.2 J29.6 U15.1 U15.3